# EAGLE board base (EAGLE 9.2.2)

Size 195 x 95 mm. Coordinates in mm from the lower left corner, seen from the top.
Outline: 107.44,30.5 107.44,64.5 arc-90 112.44,69.5 127.44,69.5 arc-90 132.44,64.5 132.44,30.5 arc-90 127.44,25.5 112.44,25.5 arc-90 107.44,30.5
Outline: 74.71,23.96 94.71,23.96 arc-90 96.71,21.96 96.71,16.96 arc-90 94.71,14.96 74.71,14.96 arc-90 72.71,16.96 72.71,21.96 arc-90 74.71,23.96
Outline: 94.84,70.96 74.71,70.96 arc-90 72.71,72.96 72.71,77.96 arc-90 74.71,79.96 94.84,79.96 arc-90 96.84,77.96 96.84,72.96 arc-90 94.84,70.96
Outline: 145.25,30.94 145.25,67.77 arc-90 150.25,72.77 159.25,72.77 arc-90 164.25,67.77 164.25,30.94 arc-90 159.25,25.94 150.25,25.94 arc-90 145.25,30.94
Outline: 128.43,1 128.43,7.65 arc-90 129.43,8.65 134.55,8.65 arc90 135.55,9.65 135.55,12.92 arc90 134.55,13.92 124.43,13.92 arc90 123.43,12.92 123.43,1 arc-90 122.43,0 72.41,0 arc-90 71.41,1 71.41,12.92 arc90 70.41,13.92 60.29,13.92 arc90 59.29,12.92 59.29,9.65 arc90 60.29,8.65 65.41,8.65 arc-90 66.41,7.65 66.41,1 arc-90 65.41,0 10,0 arc-90 0,10 0,85 arc-90 10,95 185,95 arc-90 195,85 195,10 arc-90 185,0 129.43,0 arc-90 128.43,1
Outline: 35.16,37.46 35.16,57.46 arc-90 40.16,62.46 91.55,62.46 arc-90 96.55,57.46 96.55,37.46 arc-90 91.55,32.46 40.16,32.46 arc-90 35.16,37.46
Copper layers (1*16): Top 0.035mm / dielectric 1.5mm / Bottom 0.035mm
Design rules "default": minimum track width 6mil, minimum drill 0.35mm, track to track 6mil, track to pad 6mil, pad to pad 6mil, via to via 6mil, smd to smd 6mil, copper to edge 40mil, drill to drill 6mil, minimum pad ring 10mil, minimum via ring 8mil, stop-mask expansion 4mil, vias tented up to drill 0mil, thermal gap 10mil
Holes 5 mm at 185.06,35.09 185.08,60.07 9.99,35.01 10.01,60.01
Holes 3 mm at 188.82,47.44 31.23,5.14 31.21,90.13 162.97,21.83 146.47,21.83
Holes 2.6 mm at 48.08,22.79 48.09,72.1 106.04,72.1 106.19,22.81

## Placement (x,y rotation side)
E$1  [LOGO_FABO_L]  125.62,82.11 90 top

## Library data of the parts
E$1 = FaBo-Logo

## Text on the board
tPlace: Version 1.0.0